# EAGLE board display (EAGLE 5.07)
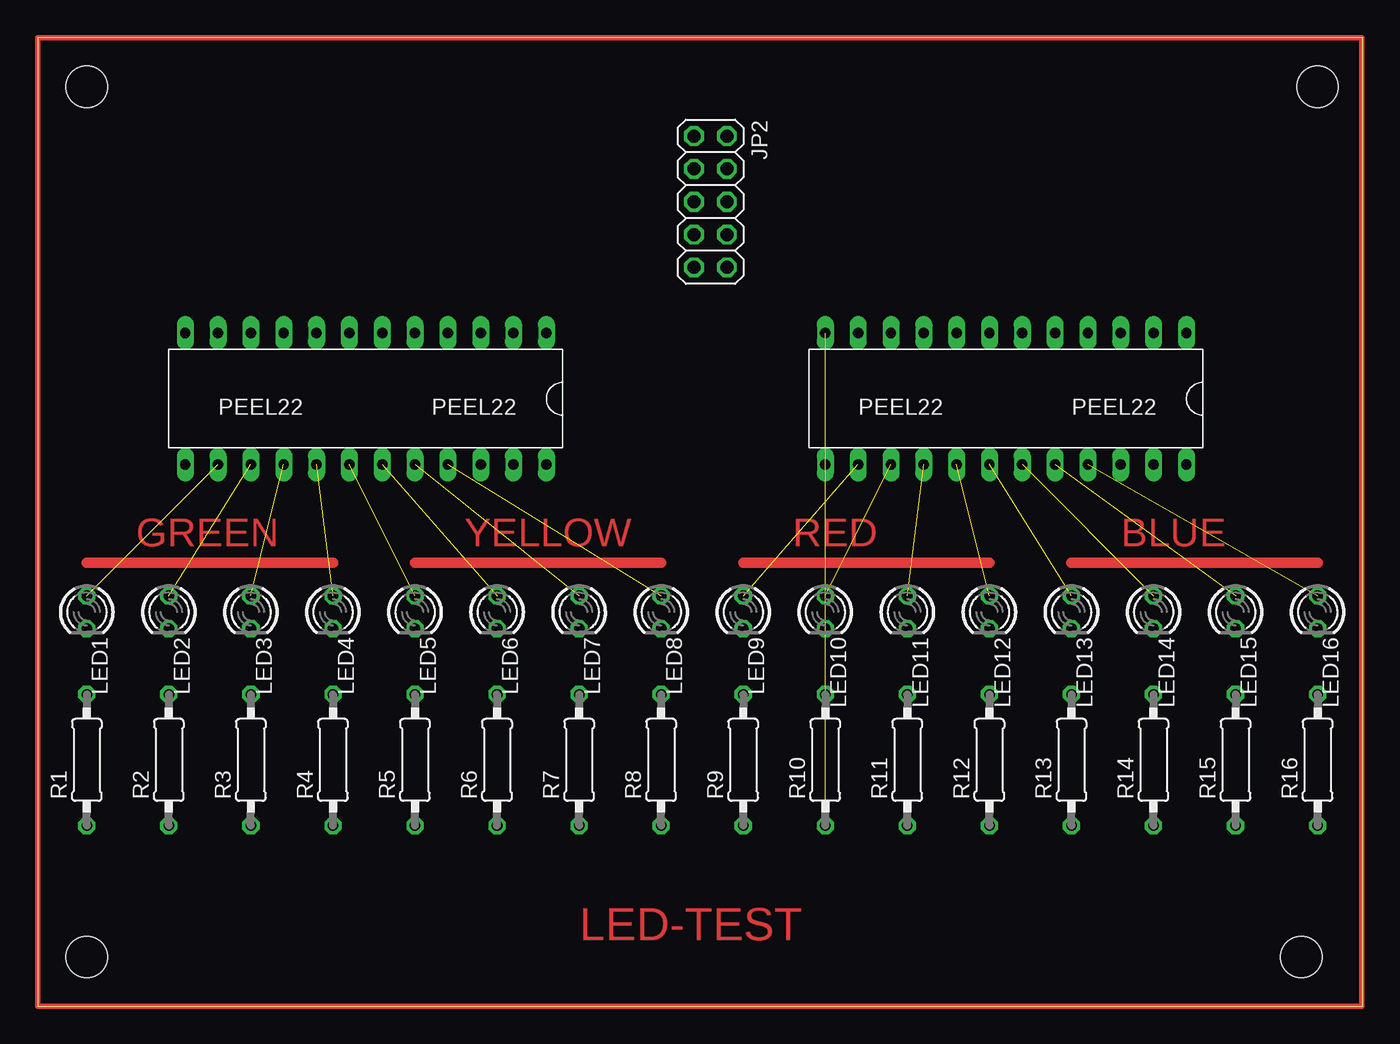
[diagram p0: board, top side]
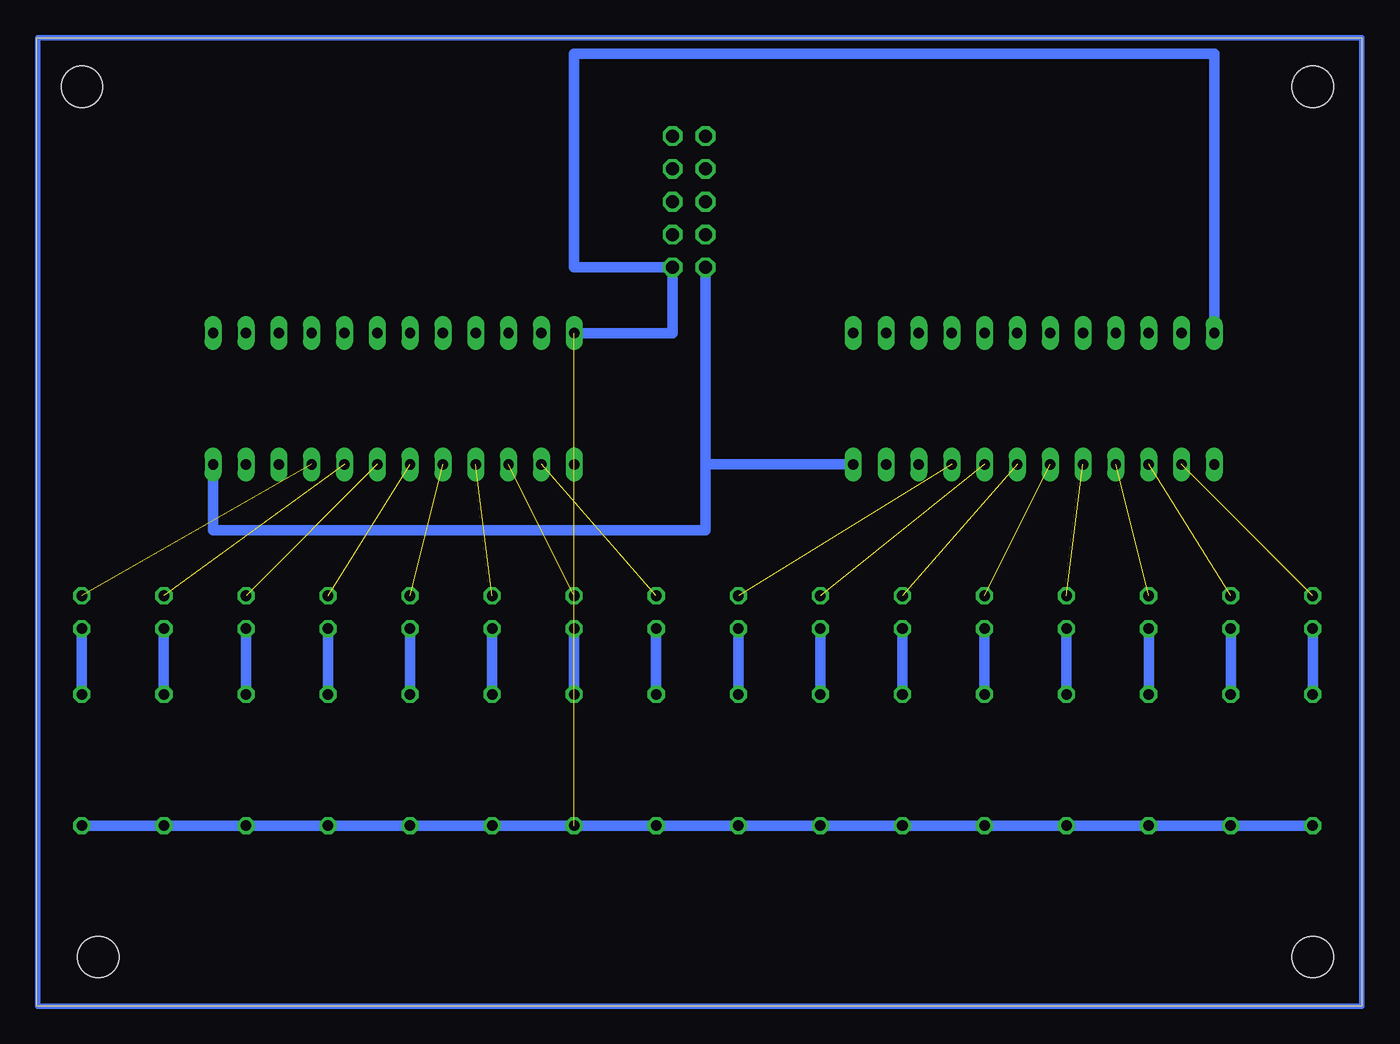
[diagram p1: board, bottom side, seen from below]

Size 102.54 x 74.92 mm. Coordinates in mm from the lower left corner, seen from the top.
Outline: 0,0 102.54,0 102.54,74.92 0,74.92 0,0
Copper layers (1*16): Top 0.035mm / dielectric 1.5mm / Bottom 0.035mm
Design rules "default": minimum track width 10mil, minimum drill 24mil, track to track 8mil, track to pad 8mil, pad to pad 8mil, via to via 8mil, smd to smd 8mil, copper to edge 40mil, drill to drill 8mil, minimum pad ring 10mil, minimum via ring 8mil, stop-mask expansion 4mil, vias tented up to drill 0mil, thermal gap 10mil
Holes 3.2 mm at 3.81,3.81 3.81,71.12 99.06,71.12 97.79,3.81

## Footprints (pad centres in the part's own frame; a part is rotated, then mirrored left to right if it is on the bottom)
2X05 = drill 1.016 octagon: 1 -5.08,-1.27; 2 -5.08,1.27; 3 -2.54,-1.27; 4 -2.54,1.27; 5 0,-1.27; 6 0,1.27; 7 2.54,-1.27; 8 2.54,1.27; 9 5.08,-1.27; 10 5.08,1.27
LED3MM = drill 0.813 octagon: A -1.27,0; K 1.27,0
0207/10 = drill 0.813 octagon: 1 -5.08,0; 2 5.08,0
PEEL = drill 0.8 long: GND -5.08,-13.97; I1/CLK -5.08,13.97; I2 -5.08,11.43; I3 -5.08,8.89; I4 -5.08,6.35; I5 -5.08,3.81; I6 -5.08,1.27; I7 -5.08,-1.27; I8 -5.08,-3.81; I9 -5.08,-6.35; I10 -5.08,-8.89; I11 -5.08,-11.43; I12 5.08,-13.97; I/O1 5.08,-11.43; I/O2 5.08,-8.89; I/O3 5.08,-6.35; I/O4 5.08,-3.81; I/O5 5.08,-1.27; I/O6 5.08,1.27; I/O7 5.08,3.81; I/O8 5.08,6.35; I/O9 5.08,8.89; I/O10 5.08,11.43; VCC 5.08,13.97

## Placement (x,y rotation side)
JP2  [2X05]  52.07,62.23 270 top
LED1  [LED3MM]  3.81,30.48 270 top
LED2  [LED3MM]  10.16,30.48 270 top
LED3  [LED3MM]  16.51,30.48 270 top
LED4  [LED3MM]  22.86,30.48 270 top
LED5  [LED3MM]  29.21,30.48 270 top
LED6  [LED3MM]  35.56,30.48 270 top
LED7  [LED3MM]  41.91,30.48 270 top
LED8  [LED3MM]  48.26,30.48 270 top
LED9  [LED3MM]  54.61,30.48 270 top
LED10  [LED3MM]  60.96,30.48 270 top
LED11  [LED3MM]  67.31,30.48 270 top
LED12  [LED3MM]  73.66,30.48 270 top
LED13  [LED3MM]  80.01,30.48 270 top
LED14  [LED3MM]  86.36,30.48 270 top
LED15  [LED3MM]  92.71,30.48 270 top
LED16  [LED3MM]  99.06,30.48 270 top
R1  [0207/10]  3.81,19.05 90 top
R2  [0207/10]  10.16,19.05 90 top
R3  [0207/10]  16.51,19.05 90 top
R4  [0207/10]  22.86,19.05 90 top
R5  [0207/10]  29.21,19.05 90 top
R6  [0207/10]  35.56,19.05 90 top
R7  [0207/10]  41.91,19.05 90 top
R8  [0207/10]  48.26,19.05 90 top
R9  [0207/10]  54.61,19.05 90 top
R10  [0207/10]  60.96,19.05 90 top
R11  [0207/10]  67.31,19.05 90 top
R12  [0207/10]  73.66,19.05 90 top
R13  [0207/10]  80.01,19.05 90 top
R14  [0207/10]  86.36,19.05 90 top
R15  [0207/10]  92.71,19.05 90 top
R16  [0207/10]  99.06,19.05 90 top
U$1  PEELPEEL22  [PEEL]  25.4,46.99 270 top
U$2  PEELPEEL22  [PEEL]  74.93,46.99 270 top

## Library data of the parts
JP2 = pinhead
LED1-LED16 = led
R1-R16 = rcl
U$1 U$2 = PEEL

## Nets
+5V: JP2.9 U$1.VCC U$2.VCC
N$1: LED1.K R1.2
N$2: LED2.K R2.2
N$5: LED3.K R3.2
N$6: LED4.K R4.2
N$12: LED5.K R5.2
N$13: LED6.K R6.2
N$14: LED7.K R7.2
N$15: LED8.K R8.2
N$17: LED9.K R9.2
N$18: LED10.K R10.2
N$19: LED11.K R11.2
N$20: LED12.K R12.2
N$21: LED13.K R13.2
N$22: LED14.K R14.2
N$23: LED15.K R15.2
N$24: LED16.K R16.2
N$27: LED1.A U$1.I/O1
N$28: LED2.A U$1.I/O2
N$29: LED3.A U$1.I/O3
N$30: LED4.A U$1.I/O4
N$31: LED5.A U$1.I/O5
N$32: LED6.A U$1.I/O6
N$33: LED7.A U$1.I/O7
N$34: LED8.A U$1.I/O8
N$35: LED9.A U$2.I/O1
N$36: LED10.A U$2.I/O2
N$37: LED11.A U$2.I/O3
N$38: LED12.A U$2.I/O4
N$39: LED13.A U$2.I/O5
N$40: LED14.A U$2.I/O6
N$41: LED15.A U$2.I/O7
N$42: LED16.A U$2.I/O8
PE: JP2.10 R1.1 R2.1 R3.1 R4.1 R5.1 R6.1 R7.1 R8.1 R9.1 R10.1 R11.1 R12.1 R13.1 R14.1 R15.1 R16.1 U$1.GND U$2.GND

## Tracks (layer width: path | path; a pad name or v marks a point on that pad's centre or on a via)
+5V
  Bottom 0.813: U$1.VCC 50.8,41.91 JP2.9 50.8,36.83 88.9,36.83 U$2.VCC
N$1
  Bottom 0.813: R1.2 LED1.K
N$2
  Bottom 0.813: R2.2 LED2.K
N$5
  Bottom 0.813: R3.2 LED3.K
N$6
  Bottom 0.813: R4.2 LED4.K
N$9
  Top 0.813: 3.81,34.29 22.86,34.29
N$10
  Bottom 0.406: 0,74.93 102.49,74.93 102.49,0 0,0 0,74.93
N$11
  Top 0.406: 0,74.93 102.49,74.93 102.49,0 0,0 0,74.8
N$12
  Bottom 0.813: R5.2 LED5.K
N$13
  Bottom 0.813: R6.2 LED6.K
N$14
  Bottom 0.813: R7.2 LED7.K
N$15
  Bottom 0.813: R8.2 LED8.K
N$16
  Top 0.813: 29.21,34.29 48.26,34.29
N$17
  Bottom 0.813: R9.2 LED9.K
N$18
  Bottom 0.813: R10.2 LED10.K
N$19
  Bottom 0.813: R11.2 LED11.K
N$20
  Bottom 0.813: R12.2 LED12.K
N$21
  Bottom 0.813: R13.2 LED13.K
N$22
  Bottom 0.813: R14.2 LED14.K
N$23
  Bottom 0.813: R15.2 LED15.K
N$24
  Bottom 0.813: R16.2 LED16.K
N$25
  Top 0.813: 54.61,34.29 73.66,34.29
N$26
  Top 0.813: 80.01,34.29 99.06,34.29
N$27  (1 unrouted)
N$28  (1 unrouted)
N$29  (1 unrouted)
N$30  (1 unrouted)
N$31  (1 unrouted)
N$32  (1 unrouted)
N$33  (1 unrouted)
N$34  (1 unrouted)
N$35  (1 unrouted)
N$36  (1 unrouted)
N$37  (1 unrouted)
N$38  (1 unrouted)
N$39  (1 unrouted)
N$40  (1 unrouted)
N$41  (1 unrouted)
N$42  (1 unrouted)
PE  (1 unrouted)
  Bottom 0.813: R1.1 R2.1 R3.1 R4.1 R5.1 R6.1 R7.1 R8.1 R9.1 R10.1 R11.1 R12.1 R13.1 R14.1 R15.1 R16.1 | U$2.GND 53.34,52.07 53.34,53.34 JP2.10 60.96,57.15 60.96,73.66 11.43,73.66 U$1.GND
(copper drawn outside any net)
  shapes: Bottom circle x4, Top circle x4

## Text on the board
Top: GREEN | YELLOW | RED | BLUE | LED-TEST